# Altium PCB 20K Control Board V1.1.PcbDoc (part 14 of 24)
Units mm, origin at the board's own origin, x right, y up, seen from the top; angles counter-clockwise.
Board outline 132 x 260 mm, 4 copper layers (Top Layer, GND, VCC, Bottom Layer); 1384 components, 779 nets, 4515 pads, 1774 vias.
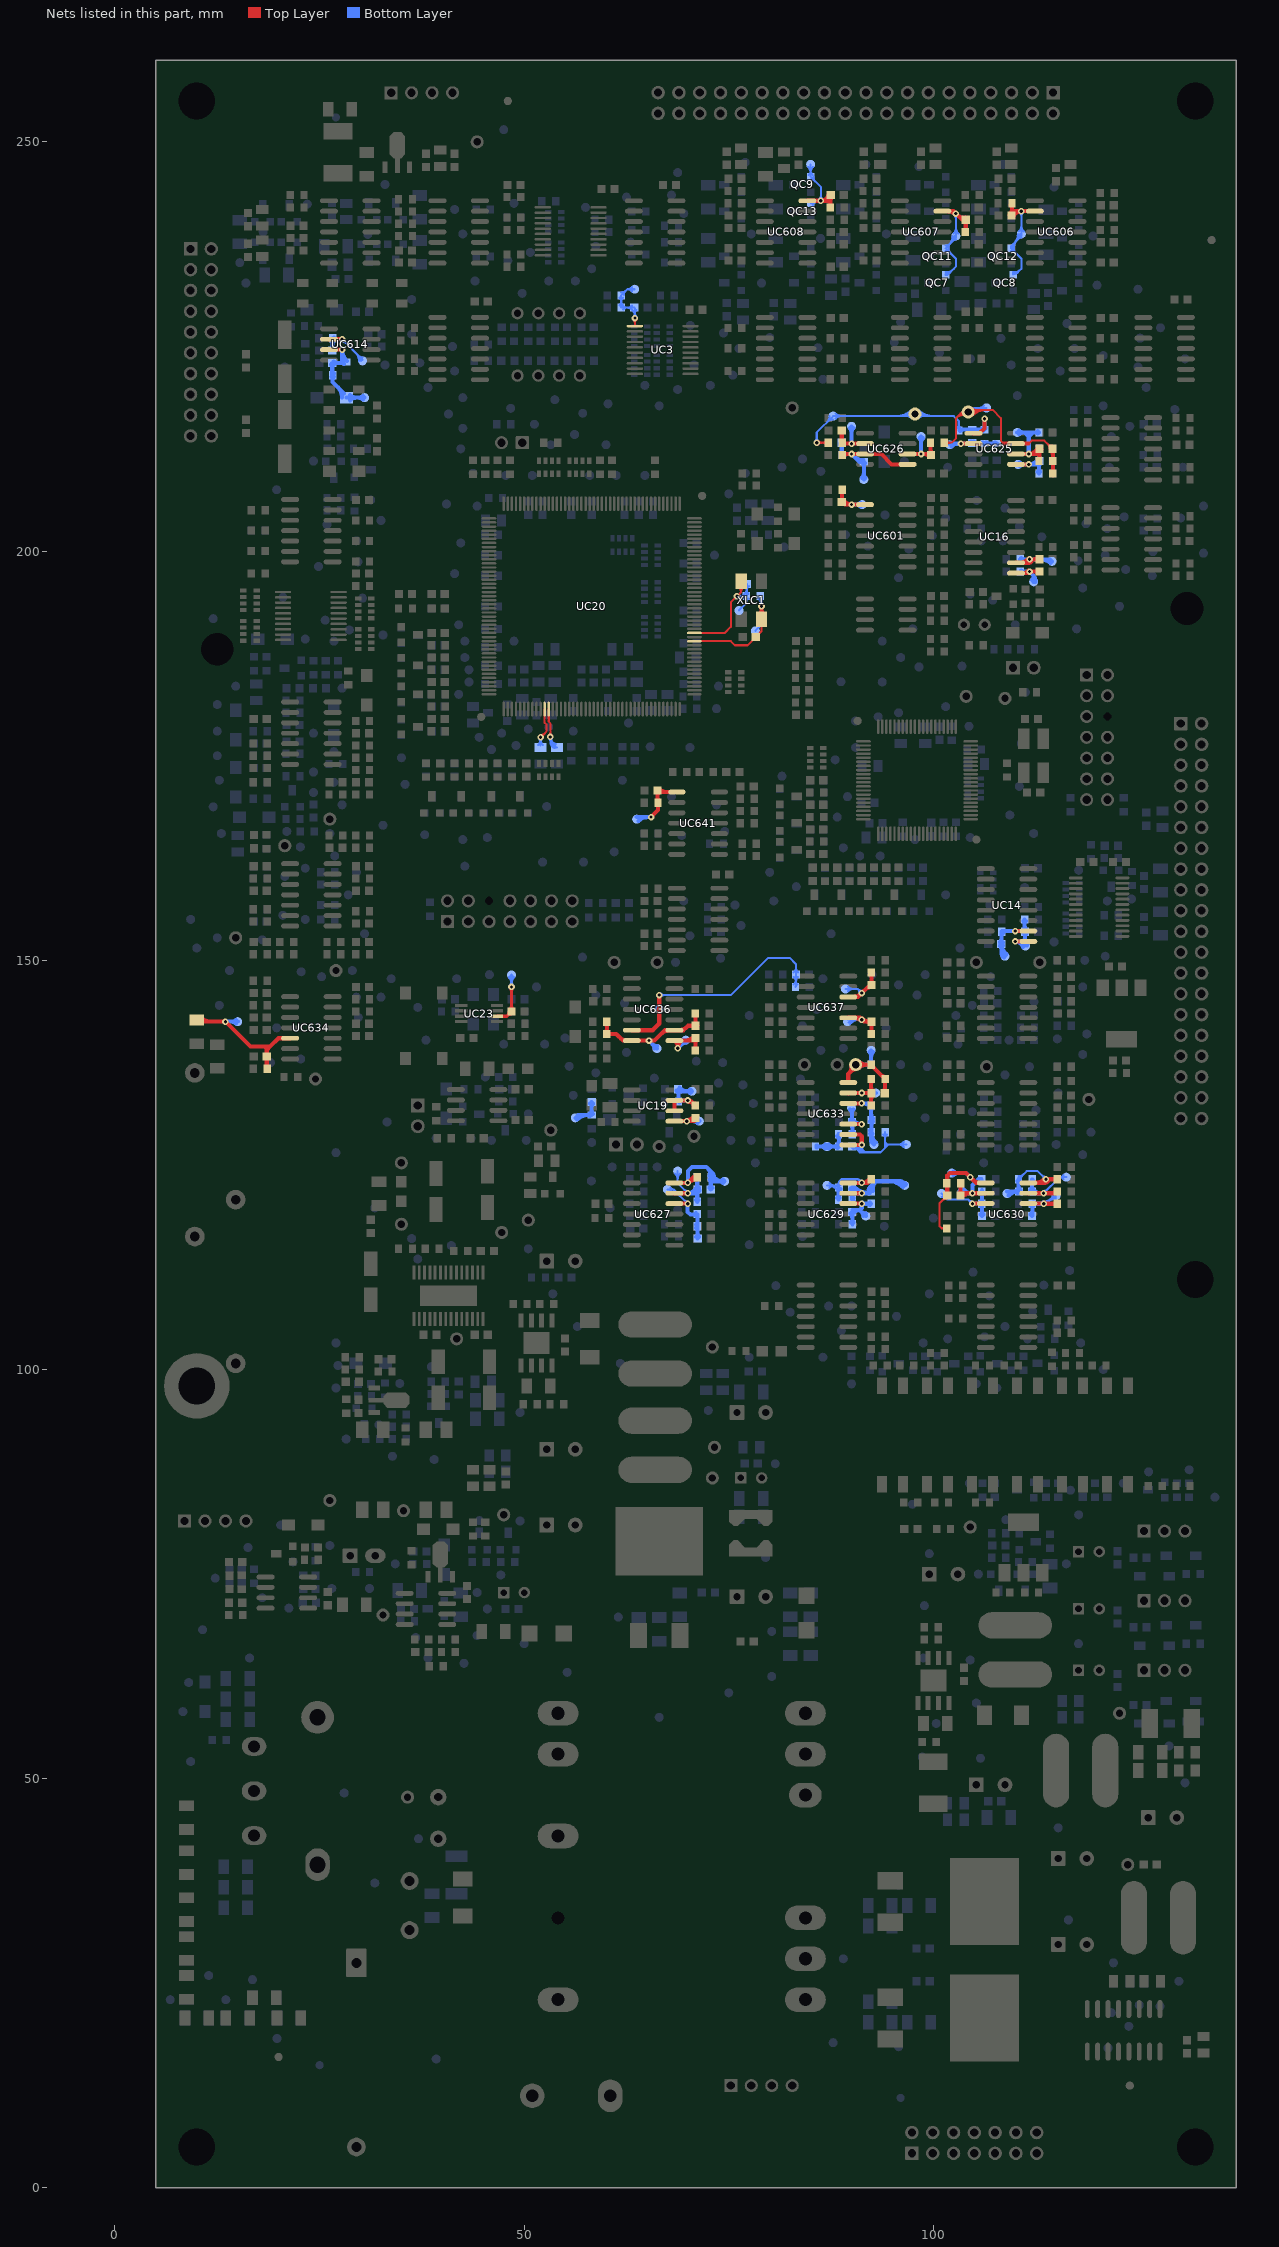
[diagram p16: the nets of this part, all layers, seen from the top]

## Via types
v1: diameter 0.8, hole 0.4, Top Layer to Bottom Layer, tented both sides, 1354 vias
v2: diameter 1.2, hole 0.7, Top Layer to Bottom Layer, 261 vias
v3: diameter 0.8, hole 0.4, Top Layer to Bottom Layer, 58 vias
v4: diameter 1.2, hole 0.7, Top Layer to Bottom Layer, tented top, 58 vias
v5: diameter 0.8, hole 0.4, Top Layer to Bottom Layer, tented top, 22 vias
v6: diameter 1.2, hole 0.7, Top Layer to Bottom Layer, tented both sides, 13 vias
v7: diameter 1.2, hole 0.7, Top Layer to Bottom Layer, tented bottom, 8 vias

## Nets (pads, with @x,y where several pads share a name; then routed paths per layer and width w, separated by ;. In a path a pad name is that pad's centre, name@x,y a point inside that pad or via, vN(x,y) a via of type N, cw(c..) or ccw(c..) an arc to the next point about the centre after c; other vN are vias at no path point) (continued)
NetCC56_1: CC56.1 pad.ICT@92.4,139 RC112.2 RC127.2 RC137.2 TP19.1 UC633.14 | length 23.9
  Top Layer w0.5: UC633.14@89.6,135.06 89.6,136.1 90.5,137 90.75,137.25 RC137.2@92.4,137.25 92.4,137.2 RC112.2@94.1,135.5 94.1,133.8 CC56.1@94.05,133.75 ; 89.725,136.225 ccw(c89.069,136.881) TP19.1@89.967,137.113 ; 89.988,136.488 cw(c90.5,135.976) TP19.1@90.5,136.7 ; TP19.1@90.889,136.861 cw(c91.828,135.922) 91.828,137.25 cw(c91.828,138.578) TP19.1@90.889,137.639 ; RC137.2@92.259,137.109 ccw(c91.917,136.767) 91.917,137.25 ccw(c91.917,137.733) RC137.2@92.259,137.391 ; RC137.2@92.4,137 cw(c92.4,136.517) 92.741,136.859 cw(c93.083,137.2) RC137.2@92.6,137.2 ; RC112.2@93.673,135.927 ccw(c94.1,136.354) RC112.2@94.1,135.75 ; CC56.1@93.873,133.927 ccw(c93.326,134.474) 94.1,134.474 ; RC112.2@93.959,135.309 cw(c93.617,134.967) 94.1,134.967 cw(c94.583,134.967) RC112.2@94.241,135.309
  Bottom Layer w0.5: TP19.1@90.5,137.25 RC127.2@92.4,137.25 pad.ICT@92.4,139 ; TP19.1@90.889,136.861 cw(c91.828,135.922) 91.828,137.25 cw(c91.828,138.578) TP19.1@90.889,137.639 ; pad.ICT@92.188,138.788 cw(c91.676,138.276) 92.4,138.276 cw(c93.124,138.276) pad.ICT@92.612,138.788 ; RC127.2@92.259,137.109 ccw(c91.917,136.767) 91.917,137.25 ccw(c91.917,137.733) RC127.2@92.259,137.391 ; RC127.2@92.259,137.441 ccw(c91.917,137.783) 92.4,137.783 ccw(c92.883,137.783) RC127.2@92.541,137.441
NetCC56_2: CC56.2 pad.ICT@92.96,133.79 RC108.2 RC112.1 UC633.13 | length 12.6
  Top Layer w0.5: UC633.13@89.64,133.75 UC633.13@89.6,133.79 CC56.2@92.41,133.79 ; 91.75,133.79 cw(c91.75,133.05) CC56.2@92.273,133.573 ; 91.943,133.79 ccw(c91.943,134.257) CC56.2@92.273,133.927 ; RC108.2@92.259,132.441 ccw(c91.917,132.783) 92.4,132.783 ccw(c92.883,132.783) RC108.2@92.541,132.441 ; RC112.1@92.259,135.309 cw(c91.917,134.967) 92.4,134.967 cw(c92.883,134.967) RC112.1@92.541,135.309 ; RC108.2@92.4,132.25 RC112.1@92.4,135.5 ; 92.4,133.026 cw(c93.174,133.026) CC56.2@92.627,133.573 ; 92.4,134.474 ccw(c93.174,134.474) CC56.2@92.627,133.927
  Bottom Layer w0.5: v1(91.25,133.79) pad.ICT@92.96,133.79 ; pad.ICT@92.748,133.578 ccw(c92.236,133.066) 92.236,133.79 ccw(c92.236,134.514) pad.ICT@92.748,134.002
NetCC57_2: CC57.2 pad.ICT@66.5,144 RC119.2 UC636.6 | length 38.4
  Top Layer w0.5: UC636.6@63.15,141.46 65.71,141.46 66.5,142.25 v1(66.5,145.75)
  Bottom Layer w0.25: pad.ICT@66.199,144.301 ccw(c65.474,145.026) 66.5,145.026 ccw(c67.526,145.026) pad.ICT@66.801,144.301 ; v1@66.306,145.556 cw(c65.836,145.086) 66.5,145.086 cw(c67.164,145.086) 66.694,145.556 cw(c67.164,145.086) 67.164,145.75 cw(c67.164,146.414) v1@66.694,145.944 ; pad.ICT@66.5,144 v1(66.5,145.75) 75.25,145.75 79.8,150.3 82.45,150.3 83.2,149.55 83.2,148.5 83.2,146.8 RC119.2@83.15,146.75 ; RC119.2@82.92,147.03 ccw(c82.245,147.705) 83.2,147.705 ; CC57.2@82.935,147.985 cw(c82.295,147.345) 83.2,147.345 cw(c84.105,147.345) CC57.2@83.465,147.985 ; CC57.2@82.935,148.515 ccw(c82.295,149.155) 83.2,149.155 ccw(c84.105,149.155) CC57.2@83.465,148.515 ; 83.2,147.464 ccw(c83.814,147.464) RC119.2@83.38,147.03
NetCC58_2: CC58.2 pad.ICT@90,215.25 RC109.1 UC626.2 | length 9.9
  Top Layer w0.25: RC109.1@88.8,213.3 RC109.1@88.965,213.135
  Top Layer w0.5: CC58.2@88.623,214.573 cw(c88.196,214.146) 88.8,214.146 cw(c89.404,214.146) CC58.2@88.977,214.573 ; 88.8,213.904 ccw(c89.454,213.904) RC109.1@88.991,213.441 ; CC58.2@88.8,214.75 88.8,213.3 88.965,213.135 UC626.2@91.65,213.135 ; RC109.1@88.991,213.341 ccw(c89.49,213.84) 89.49,213.135
  Bottom Layer w0.5: pad.ICT@89.788,215.038 cw(c89.276,214.526) 90,214.526 cw(c90.724,214.526) pad.ICT@90.212,215.038 ; v1(90,213.135) pad.ICT@90,215.25
NetCC59_2: CC59.2 pad.ICT@101,121.5 RC113.1 RC116.1 UC630.3 | length 15.8
  Top Layer w0.5: v1(104.77,120.27) UC630.3@106.4,120.27
  Bottom Layer w0.25: pad.ICT@101,121.075 cw(c101,120.049) 101.726,120.774 cw(c102.451,121.5) pad.ICT@101.425,121.5 ; pad.ICT@101,121.5 101.75,120.75 104.29,120.75 v1(104.77,120.27) ; v1@104.495,120.27 ccw(c103.831,120.27) 104.301,120.739 ccw(c104.77,121.209) v1@104.77,120.545
  Bottom Layer w0.5: v1(104.77,120.27) RC113.1@105.93,120.27 ; 105.369,120.27 cw(c105.369,119.719) RC113.1@105.759,120.109 ; RC113.1@105.759,120.059 cw(c105.296,119.596) 105.95,119.596 ; RC113.1@105.759,120.441 ccw(c105.296,120.904) 105.95,120.904 ; RC116.1@105.759,121.559 cw(c105.296,121.096) 105.95,121.096 ; CC59.2@105.773,118.927 ccw(c105.346,119.354) 105.95,119.354 ccw(c106.554,119.354) CC59.2@106.127,118.927 ; CC59.2@105.95,118.75 RC116.1@105.95,121.9
NetCC60_1: CC60.1 pad.ICT@102,213 RC118.2 RC126.2 UC625.2 | length 11.8
  Top Layer w0.5: v1(103.365,213.135) UC625.2@104.9,213.135
  Bottom Layer w0.5: pad.ICT@101.885,213.135 v1(103.365,213.135) CC60.1@104.785,213.135 ; pad.ICT@102.212,212.788 cw(c103.05,211.95) v1@103.05,213.135 ; 103.99,213.135 ccw(c103.99,213.96) CC60.1@104.573,213.377 ; CC60.1@104.8,213.15 RC126.2@106.25,213.15 RC118.2@107.75,213.15 ; CC60.1@104.927,213.377 ccw(c105.474,213.924) 105.474,213.15 ; RC126.2@106.059,213.009 ccw(c105.717,212.667) 105.717,213.15 ccw(c105.717,213.633) RC126.2@106.059,213.291 ; RC126.2@106.441,213.009 cw(c106.783,212.667) 106.783,213.15 cw(c106.783,213.633) RC126.2@106.441,213.291 ; RC118.2@107.559,213.009 ccw(c107.217,212.667) 107.217,213.15 ccw(c107.217,213.633) RC118.2@107.559,213.291
NetCC60_2: CC60.2 pad.ICT@87.75,216.5 RC105.2 RC109.2 RC126.1 TP14.1 UC625.1 | length 50.6
  Top Layer w0.25: v1(85.75,213.25) RC109.2@87.15,213.25 ; v1@85.944,213.056 cw(c86.414,212.586) 86.414,213.25 cw(c86.414,213.914) v1@85.944,213.444 ; RC109.2@86.92,213.02 ccw(c86.365,212.465) 86.365,213.25 ccw(c86.365,214.035) RC109.2@86.92,213.48
  Top Layer w0.5: UC625.1@104.9,214.405 105.655,214.405 106.25,215 v1(106.25,216.178)
  Bottom Layer w0.25: v1@85.556,213.444 ccw(c85.086,213.914) 85.75,213.914 ccw(c86.414,213.914) v1@85.944,213.444 ; v1(85.75,213.25) 85.75,214.5 pad.ICT@87.75,216.5 102.5,216.5 103.1,215.9 RC105.2@103.1,214.75 RC105.2@103.2,214.85 ; pad.ICT@87.325,216.5 cw(c86.299,216.5) 87.024,215.774 cw(c87.75,215.049) pad.ICT@87.75,216.075 ; pad.ICT@88.051,216.199 cw(c88.776,215.474) 88.776,216.5 cw(c88.776,217.526) pad.ICT@88.051,216.801 ; 95.517,216.5 ccw(c95.517,218.983) TP14.1@97.273,217.227 ; 96.12,216.5 ccw(c96.12,218.38) TP14.1@97.449,217.051 ; TP14.1@97.273,216.273 ccw(c96.724,215.724) 96.724,216.5 ccw(c96.724,217.776) TP14.1@97.626,216.874 ; TP14.1@97.874,216.874 ccw(c98.776,217.776) 98.776,216.5 ccw(c98.776,215.724) TP14.1@98.227,216.273 ; TP14.1@98.051,217.051 ccw(c99.38,218.38) 99.38,216.5 ; TP14.1@98.227,217.227 ccw(c99.983,218.983) 99.983,216.5 ; RC105.2@102.87,215.03 ccw(c102.315,215.585) 103.1,215.585 ccw(c103.885,215.585) RC105.2@103.33,215.03
  Bottom Layer w0.5: RC105.2@103.2,214.85 RC126.1@106.25,214.85 v1(106.25,216.178) ; RC105.2@103.241,214.659 cw(c103.704,214.196) 103.704,214.85 ; 104.026,214.85 cw(c104.026,214.076) CC60.2@104.573,214.623 ; CC60.2@104.927,214.623 cw(c105.474,214.076) 105.474,214.85 ; RC126.1@106.059,214.709 ccw(c105.717,214.367) 105.717,214.85 ccw(c105.717,215.333) RC126.1@106.059,214.991 ; RC126.1@106.109,214.991 ccw(c105.767,215.333) 106.25,215.333 ccw(c106.733,215.333) RC126.1@106.391,214.991
NetCC61_1: CC61.1 pad.ICT@102.25,124 RC122.2 RC136.2 UC630.1 | length 21.7
  Top Layer w0.25: CC61.1@101.325,121.25 cw(c100.42,121.25) 101.06,120.61 cw(c101.7,119.97) CC61.1@101.7,120.875 ; RC122.2@101.39,117.055 ccw(c101,116.763) 101,117.25 ; RC122.2@101.39,117.445 cw(c101,117.737) 101,117.25 ; RC122.2@101.65,117.25 101,117.25 ; CC61.1@101.7,121.25 100.75,120.3 100.75,117.5 101,117.25
  Top Layer w0.5: RC136.2@101.509,122.559 cw(c101.046,122.096) 101.7,122.096 ; RC136.2@101.509,122.941 ccw(c101.046,123.404) 101.7,123.404 ; CC61.1@101.523,121.427 ccw(c101.096,121.854) 101.7,121.854 ccw(c102.304,121.854) CC61.1@101.877,121.427 ; CC61.1@101.7,121.25 101.7,123.7 102,124 104,124 105.19,122.81 UC630.1@106.4,122.81 ; 104.815,123.185 ccw(c105.6,123.971) UC630.1@105.6,122.86
  Bottom Layer w0.5: pad.ICT@102.25,124 104,124 v1(104.5,123.5) ; pad.ICT@102.462,123.788 cw(c102.974,123.276) 102.974,124 cw(c102.974,124.724) pad.ICT@102.462,124.212
NetCC61_2: CC61.2 pad.ICT@103.5,121.75 RC132.2 RC136.1 UC630.2 | length 13.1
  Top Layer w0.5: CC61.2@103.123,121.427 ccw(c102.696,121.854) 103.3,121.854 ccw(c103.904,121.854) CC61.2@103.477,121.427 ; CC61.2@103.3,121.25 RC136.1@103.3,122.7 ; 103.3,122.096 cw(c103.954,122.096) RC136.1@103.491,122.559 ; CC61.2@103.477,121.073 cw(c104.604,119.946) v1@104.604,121.54 ; CC61.2@103.59,121.54 v1(104.77,121.54) UC630.2@106.4,121.54
  Bottom Layer w0.5: pad.ICT@103.5,121.75 103.71,121.54 v1(104.77,121.54) 104.77,122.52 105.5,123.25 RC132.2@105.9,123.25 ; pad.ICT@103.712,121.962 ccw(c104.731,122.981) v1@104.731,121.54 ; 104.79,122.54 cw(c105.9,121.431) RC132.2@105.9,123
NetCC65_2: CC65.2 pad.ICT@91.5,208.75 RC115.1 RC124.1 RC125.2 UC626.3 UC626.5 | length 21
  Top Layer w0.25: RC115.1@88.85,211.75 RC115.1@88.965,211.865
  Top Layer w0.5: RC115.1@88.965,211.865 v1(90,211.865) UC626.3@91.65,211.865 93.635,211.865 94.905,210.595 UC626.5@96.85,210.595 ; RC115.1@88.991,211.659 cw(c89.49,211.16) 89.49,211.865
  Bottom Layer w0.5: CC65.2@88.623,213.073 cw(c88.196,212.646) 88.8,212.646 cw(c89.404,212.646) CC65.2@88.977,213.073 ; RC124.1@88.8,211.8 CC65.2@88.8,213.25 ; 88.8,212.404 ccw(c89.454,212.404) RC124.1@88.991,211.941 ; RC124.1@88.865,211.865 v1(90,211.865) 90.965,210.9 RC125.2@91.5,210.9 pad.ICT@91.5,208.75 ; RC124.1@88.991,211.659 cw(c89.49,211.16) 89.49,211.865 ; v1@90.281,211.584 ccw(c91.45,212.754) RC125.2@91.45,211.1 ; pad.ICT@91.288,208.962 ccw(c90.776,209.474) 91.5,209.474 ccw(c92.224,209.474) pad.ICT@91.712,208.962 ; RC125.2@91.359,210.759 cw(c91.017,210.417) 91.5,210.417 cw(c91.983,210.417) RC125.2@91.641,210.759
NetCC66_1: CC66.1 pad.ICT@96.7,127.5 RC131.1 UC633.8 UC633.9 | length 30.6
  Top Layer w0.5: UC633.8@89.6,127.44 v1(91.25,127.44) 91.25,128.5 91.04,128.71 UC633.9@89.6,128.71
  Bottom Layer w0.25: CC66.1@90.047,127.375 cw(c90.069,126.516) 90.676,127.124 ; CC66.1@90.053,127.125 cw(c90.089,125.713) 91.088,126.712 ; CC66.1@90.3,127.25 91,126.55 93.55,126.55 94.1,127.1 ; CC66.1@90.55,127.25 91.25,126.55 ; 90.75,127.25 91.25,126.75 ; 90.75,127.44 91.25,126.94 ; v1(91.25,127.44) 91.25,126.55 ; 91.64,126.55 91.25,126.94 ; RC131.1@93.87,128.72 cw(c93.315,128.165) 94.1,128.165 cw(c94.885,128.165) RC131.1@94.33,128.72 ; 94.1,127.75 94.35,127.5 94.5,127.5 ; RC131.1@94.1,129 94.1,127.5 ; pad.ICT@96.399,127.199 ccw(c95.674,126.474) 95.674,127.5 ccw(c95.674,128.526) pad.ICT@96.399,127.8 ; pad.ICT@96.7,127.5 94.5,127.5 ; v1@91.056,127.246 cw(c90.586,126.776) 91.25,126.776 ; v1@91.056,127.246 cw(c90.586,126.776) 91.25,126.776 ; v1@91.056,127.246 cw(c90.586,126.776) 91.25,126.776 ; v1@91.103,127.208 cw(c90.933,126.94) 91.25,126.94 ; v1@91.103,127.208 cw(c90.933,126.94) 91.25,126.94 ; v1@91.103,127.208 cw(c90.933,126.94) 91.25,126.94 ; 91.25,126.55 91.25,126.75 ; 91.25,126.75 91.25,126.94 ; 91.25,126.776 cw(c91.914,126.776) v1@91.444,127.246 ; 91.25,126.776 cw(c91.914,126.776) v1@91.444,127.246 ; 91.25,126.776 cw(c91.914,126.776) v1@91.444,127.246 ; 91.25,126.94 cw(c91.567,126.94) v1@91.397,127.208 ; 91.25,126.94 cw(c91.567,126.94) v1@91.397,127.208 ; 91.25,126.94 cw(c91.567,126.94) v1@91.397,127.208 ; 94.1,127.1 94.1,127.5 ; 94.1,127.1 94.5,127.5 ; 94.1,127.5 94.25,127.5 94.5,127.5
  Bottom Layer w0.5: CC66.1@90.05,127.25 90.24,127.44 v1(91.25,127.44) ; CC66.1@90.227,127.073 cw(c91.112,126.188) v1@91.112,127.44
NetCC66_2: CC66.2 pad.ICT@87,127.25 RC138.1 RC139.2 | length 9.6
  Bottom Layer w0.5: RC138.1@85.741,127.109 cw(c86.083,126.767) 86.083,127.25 cw(c86.083,127.733) RC138.1@85.741,127.391 ; RC138.1@85.85,127.25 CC66.2@88.45,127.25 88.45,128.7 RC139.2@88.4,128.75 ; pad.ICT@86.788,127.038 ccw(c86.276,126.526) 86.276,127.25 ccw(c86.276,127.974) pad.ICT@86.788,127.462 ; pad.ICT@87.212,127.038 cw(c87.724,126.526) 87.724,127.25 cw(c87.724,127.974) pad.ICT@87.212,127.462 ; RC139.2@88.259,128.559 cw(c87.796,128.096) 88.45,128.096 ; CC66.2@88.273,127.073 ccw(c87.846,126.646) 87.846,127.25 ccw(c87.846,127.854) 88.273,127.427 ccw(c87.846,127.854) 88.45,127.854 ccw(c89.054,127.854) CC66.2@88.627,127.427
NetCC67_2: CC67.2 pad.ICT@110.345,210.595 RC142.1 RC145.2 UC625.5 | length 12.7
  Top Layer w0.5: UC625.5@110.1,210.595 v1(111.655,210.595)
  Bottom Layer w0.5: pad.ICT@110.345,210.595 v1(111.655,210.595) ; pad.ICT@110.557,210.383 cw(c111.069,209.871) 111.069,210.595 cw(c111.069,211.319) pad.ICT@110.557,210.807 ; CC67.2@112.644,210.595 ccw(c112.644,211.225) CC67.2@113.151,210.852 ; CC67.2@112.749,211.148 cw(c111.655,211.953) v1(111.655,210.595) ; RC142.1@112.759,209.691 ccw(c112.417,210.033) 112.9,210.033 ccw(c113.383,210.033) RC142.1@113.041,209.691 ; RC145.2@112.759,212.309 cw(c112.417,211.967) 112.9,211.967 cw(c113.383,211.967) RC145.2@113.041,212.309 ; CC67.2@112.805,210.595 v1(111.655,210.595) ; RC142.1@112.9,209.5 RC145.2@112.9,212.5 ; 112.9,210.276 cw(c113.674,210.276) CC67.2@113.127,210.823 ; 112.9,211.724 ccw(c113.674,211.724) CC67.2@113.127,211.177
NetCC68_1: CC68.1 pad.ICT@90,132 RC139.1 UC633.10 | length 10
  Top Layer w0.5: UC633.10@89.6,129.98 v1(91.23,129.98)
  Bottom Layer w0.5: pad.ICT@89.788,131.788 cw(c89.155,131.155) 90.05,131.155 ; CC68.1@89.873,130.073 cw(c89.326,129.526) 90.1,129.526 ; CC68.1@89.873,130.427 ccw(c89.446,130.854) 90.05,130.854 ccw(c90.654,130.854) CC68.1@90.227,130.427 ; RC139.1@89.959,128.941 ccw(c89.617,129.283) 90.1,129.283 ccw(c90.583,129.283) RC139.1@90.241,128.941 ; CC68.1@90.05,130.25 pad.ICT@90.05,131.7 ; 90.05,131.396 cw(c90.604,131.396) pad.ICT@90.212,131.788 ; RC139.1@90.1,128.75 CC68.1@90.1,130.2 ; CC68.1@90.235,130.419 ccw(c91.23,131.329) v1(91.23,129.98) CC68.1@90.32,129.98
NetCC69_1: CC69.1 pad.ICT@92.75,127.5 RC131.2 RC140.2 UC633.12 | length 14
  Top Layer w0.5: UC633.12@89.6,132.52 v1(91.23,132.52)
  Bottom Layer w0.5: v1(91.23,132.52) 92.13,132.52 RC140.2@92.4,132.25 ; v1@91.386,132.52 cw(c91.386,131.286) RC140.2@92.259,132.159 ; RC131.2@92.259,128.809 cw(c91.917,128.467) 92.4,128.467 cw(c92.883,128.467) RC131.2@92.541,128.809 ; RC131.2@92.259,129.191 ccw(c91.796,129.654) 92.45,129.654 ; RC140.2@92.259,132.059 cw(c91.917,131.717) 92.4,131.717 cw(c92.883,131.717) RC140.2@92.541,132.059 ; CC69.1@92.273,130.323 cw(c91.846,129.896) 92.45,129.896 cw(c93.054,129.896) CC69.1@92.627,130.323 ; CC69.1@92.4,130.55 RC140.2@92.4,132.25 ; 92.4,131.224 ccw(c93.174,131.224) CC69.1@92.627,130.677 ; RC131.2@92.45,129.05 CC69.1@92.45,130.5 CC69.1@92.45,130.3 ; RC140.2@92.45,132.15 92.45,132.2 RC140.2@92.4,132.25 ; pad.ICT@92.75,127.5 92.4,127.85 RC131.2@92.4,129 ccw(c94.156,129) pad.ICT@92.955,127.719
NetCC70_1: CC70.1 pad.ICT@98.5,214 RC135.1 UC626.6 | length 9.6
  Top Layer w0.5: UC626.6@96.85,211.865 v1(98.5,211.865) 99.585,211.865 99.65,211.93 RC135.1@99.65,213.25 ; v1@98.819,211.865 cw(c98.819,210.869) CC70.1@99.523,211.573 ; RC135.1@99.509,213.059 cw(c99.167,212.717) 99.65,212.717 cw(c100.133,212.717) RC135.1@99.791,213.059 ; 99.65,212.474 ccw(c100.424,212.474) CC70.1@99.877,211.927
  Bottom Layer w0.5: pad.ICT@98.288,213.788 cw(c97.776,213.276) 98.5,213.276 cw(c99.224,213.276) pad.ICT@98.712,213.788 ; v1(98.5,211.865) pad.ICT@98.5,214
NetCC73_2: CC73.2 pad.ICT@69.75,140.25 RC149.2 UC636.8 | length 12.5
  Top Layer w0.5: v1@68.75,139.168 cw(c70.084,139.168) UC636.8@69.184,140.153 ; v1(68.75,139.25) 68.75,139.79 UC636.8@68.35,140.19 CC73.2@70.95,140.19 ; v1@68.75,139.624 cw(c69.281,139.624) UC636.8@69.161,140.141 ; 69.598,140.19 ccw(c69.598,141.852) CC73.2@70.773,140.677 ; RC149.2@70.759,139.191 ccw(c70.296,139.654) 70.95,139.654 ; CC73.2@70.773,140.323 cw(c70.346,139.896) 70.95,139.896 cw(c71.554,139.896) CC73.2@71.127,140.323 ; CC73.2@70.81,140.19 CC73.2@70.95,140.05 ; RC149.2@70.95,139.05 CC73.2@70.95,140.5
  Bottom Layer w0.5: v1(68.75,139.25) pad.ICT@69.75,140.25 ; pad.ICT@69.45,140.25 cw(c68.726,140.25) 69.238,139.738 cw(c69.75,139.226) pad.ICT@69.75,139.95
NetCC75_1: CC75.1 pad.ICT@110.25,214.5 RC151.2 RC152.2 UC625.6 | length 16.6
  Top Layer w0.5: UC625.6@110.1,211.865 v1(111.655,211.865) ; 112.387,211.865 ccw(c112.387,212.72) CC75.1@113.183,212.409 ; CC75.1@112.717,212.591 cw(c111.655,213.005) v1(111.655,211.865) ; RC152.2@112.759,211.191 ccw(c112.296,211.654) 112.95,211.654 ; CC75.1@112.773,212.323 cw(c112.346,211.896) 112.95,211.896 cw(c113.554,211.896) CC75.1@113.127,212.323 ; 112.835,211.865 v1(111.655,211.865) ; RC152.2@112.95,211.05 CC75.1@112.95,212.5
  Bottom Layer w0.5: pad.ICT@110.25,214.5 111.655,214.5 ; pad.ICT@110.462,214.288 cw(c110.974,213.776) 110.974,214.5 cw(c110.974,215.224) pad.ICT@110.462,214.712 ; 111.155,214.5 111.655,214 ; v1(111.655,211.865) 111.655,214 ; 112.155,214.5 111.655,214 ; RC151.2@112.759,214.359 ccw(c112.417,214.017) 112.417,214.5 ccw(c112.417,214.983) RC151.2@112.759,214.641 ; RC151.2@112.9,214.5 111.655,214.5 ; 111.655,214 111.655,214.5
NetCC75_2: CC75.2 pad.ICT@106.5,217.5 RC135.2 RC146.2 RC152.1 TP17.1 UC625.7 | length 48
  Top Layer w0.25: RC135.2@101.25,213.25 RC135.2@101.3,213.3 ; RC135.2@101.35,213.25 102.25,213.25 102.75,213.75 102.75,216.25 103.75,217.25 107.25,217.25 108.25,216.25 108.25,213.5 108.615,213.135 ; RC135.2@101.58,213.02 cw(c102.135,212.465) 102.135,213.25 cw(c102.135,214.035) RC135.2@101.58,213.48 ; 102.686,216.186 cw(c103.77,215.103) TP17.1@104.146,216.588 ; 102.997,216.497 cw(c103.895,215.599) TP17.1@104.207,216.83 ; 103.308,216.808 cw(c104.021,216.096) TP17.1@104.268,217.073 ; TP17.1@104.374,216.876 cw(c105.276,215.974) 105.276,217.25 cw(c105.276,218.026) TP17.1@104.727,217.477 ; TP17.1@104.551,216.699 cw(c105.88,215.37) 105.88,217.25 ; TP17.1@104.727,216.523 cw(c106.483,214.767) 106.483,217.25 ; 111.635,213.135 112,213.5 113.55,213.5 CC75.2@114.55,212.5 ; CC75.2@114.175,212.5 ccw(c113.27,212.5) 113.91,213.14 ccw(c114.55,213.78) CC75.2@114.55,212.875
  Top Layer w0.5: 108.615,213.135 UC625.7@110.1,213.135 111.635,213.135 ; CC75.2@114.373,212.323 cw(c113.826,211.776) 114.6,211.776 ; RC146.2@114.459,209.691 ccw(c114.117,210.033) 114.6,210.033 ccw(c115.083,210.033) RC146.2@114.741,209.691 ; RC152.1@114.459,210.809 cw(c114.117,210.467) 114.6,210.467 cw(c115.083,210.467) RC152.1@114.741,210.809 ; RC152.1@114.459,211.191 ccw(c114.117,211.533) 114.6,211.533 ccw(c115.083,211.533) RC152.1@114.741,211.191 ; CC75.2@114.55,212.5 CC75.2@114.55,212.7 ; RC146.2@114.6,209.25 CC75.2@114.6,212.2
  Bottom Layer w0.25: TP17.1@104.188,217.043 cw(c105.064,216.433) 105.064,217.5 ; TP17.1@104.25,217 104.75,217.5 pad.ICT@106.5,217.5 ccw(c106.5,215.433) TP17.1@104.804,216.614 ; TP17.1@104.394,216.9 cw(c105.543,216.1) 105.543,217.5 ; TP17.1@104.599,216.757 cw(c106.021,215.767) pad.ICT@106.021,217.5 ; pad.ICT@106.199,217.199 ccw(c105.474,216.474) 105.474,217.5 ccw(c105.474,218.526) pad.ICT@106.199,217.801
NetCC80_1: CC80.1 pad.ICT@66.22,139.22 RC130.1 RC134.1 RC157.1 UC636.7 UC636.9 | length 24.9
  Top Layer w0.5: RC130.1@59.959,141.191 ccw(c59.617,141.533) 60.1,141.533 ccw(c60.583,141.533) RC130.1@60.241,141.191 ; RC134.1@59.959,142.309 cw(c59.617,141.967) 60.1,141.967 cw(c60.583,141.967) RC134.1@60.241,142.309 ; RC134.1@60.1,142.5 RC130.1@60.1,141 61.25,141 62.06,140.19 UC636.7@63.15,140.19 65.94,140.19 67.21,141.46 UC636.9@68.35,141.46 69.46,141.46 70,142 CC80.1@71.2,142 ; RC130.1@60.241,140.859 cw(c60.583,140.517) 60.583,141 cw(c60.583,141.483) RC130.1@60.241,141.141 ; 61.77,140.48 ccw(c62.35,141.061) UC636.7@62.35,140.24 ; 66.884,141.134 cw(c67.55,140.468) UC636.9@67.55,141.41 ; 67.04,141.29 cw(c67.389,140.941) UC636.9@67.535,141.412 ; UC636.9@69.15,141.51 ccw(c69.15,142.379) 69.765,141.765 ; RC157.1@70.759,143.309 cw(c70.296,142.846) 70.95,142.846 ; CC80.1@70.773,141.823 ccw(c70.346,141.396) 70.346,142 ccw(c70.346,142.604) 70.773,142.177 ccw(c70.346,142.604) 70.95,142.604 ccw(c71.554,142.604) CC80.1@71.127,142.177 ; CC80.1@70.95,142 RC157.1@70.95,143.45
  Bottom Layer w0.5: v1(65.25,140.19) pad.ICT@66.22,139.22 ; pad.ICT@65.92,139.22 ccw(c65.196,139.22) 65.708,139.732 ccw(c66.22,140.244) pad.ICT@66.22,139.52
NetCC85_2: CC85.2 pad.ICT@67.5,122 RC165.2 RC167.2 UC627.12 | length 15.3
  Top Layer w0.5: UC627.12@68.35,120.27 v1(69.98,120.27)
  Bottom Layer w0.25: pad.ICT@67.5,122 68.25,122 ; pad.ICT@67.865,121.782 cw(c68.25,121.551) 68.25,122 ; pad.ICT@67.865,122.218 ccw(c68.25,122.449) 68.25,122 ; v1@69.705,120.27 ccw(c69.041,120.27) 69.511,120.739 ccw(c69.98,121.209) v1@69.98,120.545 ; v1(69.98,120.27) 68.25,122
  Bottom Layer w0.5: v1(69.98,120.27) 69.98,119.27 70.3,118.95 71.2,118.95 CC85.2@71.2,116 ; RC165.2@71.009,117.309 cw(c70.546,116.846) 71.2,116.846 ; RC165.2@71.009,117.691 ccw(c70.546,118.154) 71.2,118.154 ; RC167.2@71.009,119.091 cw(c70.667,119.433) 70.667,118.95 cw(c70.667,118.467) 71.009,118.809 cw(c70.546,118.346) 71.2,118.346 ; CC85.2@71.023,116.177 ccw(c70.596,116.604) 71.2,116.604 ccw(c71.804,116.604) CC85.2@71.377,116.177
NetCC86_2: CC86.2 pad.ICT@89.5,142.5 RC163.2 UC637.10 | length 14.1
  Top Layer w0.5: UC637.10@89.6,142.98 91.02,142.98 91.5,142.5 92.4,142.5 92.45,142.45 RC163.2@92.45,141 ; UC637.10@90.333,142.98 cw(c90.333,141.833) v1@91.144,142.644 ; v1@91.356,142.856 ccw(c92.216,143.716) CC86.2@92.216,142.5 ; RC163.2@92.259,141.191 ccw(c91.796,141.654) 92.45,141.654 ; CC86.2@92.273,142.677 cw(c91.846,143.104) 91.846,142.5 cw(c91.846,141.896) 92.273,142.323 cw(c91.846,141.896) 92.45,141.896 cw(c93.054,141.896) CC86.2@92.627,142.323
  Bottom Layer w0.25: pad.ICT@89.5,142.75 v1(91.25,142.75) ; pad.ICT@89.624,142.376 cw(c90.526,141.474) 90.526,142.75 ; pad.ICT@89.801,142.199 cw(c91.13,140.87) v1@91.13,142.75 ; v1@91.056,142.556 ccw(c90.586,142.086) 90.586,142.75 ccw(c90.586,143.414) v1@91.056,142.944
NetCC91_1: CC91.1 pad.ICT@68.75,124.25 RC177.2 RC178.2 UC627.13 | length 16.3
  Top Layer w0.5: UC627.13@68.35,121.54 v1(69.98,121.54)
  Bottom Layer w0.25: pad.ICT@68.449,123.949 cw(c67.724,123.224) 68.75,123.224 cw(c69.776,123.224) pad.ICT@69.051,123.949 ; pad.ICT@68.75,124.25 68.75,122.77 v1(69.98,121.54) ; v1@69.705,121.54 ccw(c69.041,121.54) 69.511,122.009 ccw(c69.98,122.479) v1@69.98,121.815
  Bottom Layer w0.5: CC91.1@70.839,121.54 ccw(c70.839,122.205) CC91.1@71.417,121.877 ; CC91.1@70.983,122.123 cw(c69.98,122.693) v1(69.98,121.54) CC91.1@71.15,121.54 ; RC177.2@71.009,120.691 ccw(c70.667,121.033) 71.15,121.033 ccw(c71.633,121.033) RC177.2@71.291,120.691 ; RC178.2@71.009,123.309 cw(c70.667,122.967) 71.15,122.967 cw(c71.633,122.967) RC178.2@71.291,123.309 ; RC177.2@71.15,120.5 RC178.2@71.15,123.5 ; 71.15,121.276 cw(c71.924,121.276) CC91.1@71.377,121.823 ; 71.15,122.724 ccw(c71.924,122.724) CC91.1@71.377,122.177
NetCC91_2: CC91.2 pad.ICT@74.5,123 RC169.2 RC178.1 UC627.14 | length 21.9
  Top Layer w0.5: UC627.14@68.35,122.81 v1(70,122.81) 70.69,123.5 ; v1@69.938,122.748 cw(c71.15,121.536) RC169.2@71.15,123.25 ; 70.46,123.27 cw(c70.789,122.941) RC169.2@71.042,123.332 ; RC169.2@71.004,123.364 ccw(c70.69,123.071) 70.69,123.5 ; RC169.2@71.004,123.636 cw(c70.69,123.929) 70.69,123.5 ; RC169.2@71.15,123.5 70.69,123.5
  Bottom Layer w0.5: v1(70,122.81) 70,124.25 70.5,124.75 72.25,124.75 72.8,124.2 CC91.2@72.8,122 ; 72.5,124.5 cw(c71.942,123.942) RC178.1@72.666,123.629 ; CC91.2@72.623,122.177 ccw(c72.196,122.604) 72.8,122.604 ccw(c73.404,122.604) CC91.2@72.977,122.177 ; RC178.1@72.638,123.238 ccw(c73.212,123.812) RC178.1@73.212,123 ; 72.8,122.846 cw(c73.454,122.846) RC178.1@72.991,123.309 ; RC178.1@72.8,123.25 73.05,123 pad.ICT@74.5,123 ; 72.8,124.154 ccw(c73.454,124.154) RC178.1@72.991,123.691 ; 72.938,124.062 cw(c72.426,123.55) RC178.1@73.15,123.55 ; RC178.1@72.991,123.591 ccw(c74.419,125.019) pad.ICT@74.419,123 ; RC178.1@73.021,123.979 cw(c72.669,123.628) RC178.1@73.125,123.431 ; pad.ICT@74.288,122.788 ccw(c73.776,122.276) 73.776,123 ccw(c73.776,123.724) pad.ICT@74.288,123.212
NetCC92_2: CC92.2 pad.ICT@89.25,146.5 RC174.2 UC637.12 | length 12.9
  Top Layer w0.5: UC637.12@89.6,145.52 90.77,145.52 v1(91.25,146) 92,146.75 CC92.2@92.45,146.75 ; UC637.12@90.4,145.57 ccw(c90.4,146.584) v1@91.117,145.867 ; 91.682,146.432 cw(c92.45,145.664) CC92.2@92.45,146.75 ; RC174.2@92.259,148.309 cw(c91.796,147.846) 92.45,147.846 ; CC92.2@92.273,147.177 ccw(c91.846,147.604) 92.45,147.604 ccw(c93.054,147.604) CC92.2@92.627,147.177 ; CC92.2@92.45,146.8 CC92.2@92.45,146.75 ; CC92.2@92.45,147 RC174.2@92.45,148.5
  Bottom Layer w0.25: pad.ICT@89.25,146.5 90.75,146.5 v1(91.25,146) ; pad.ICT@89.551,146.199 cw(c90.276,145.474) 90.276,146.5 cw(c90.276,147.526) pad.ICT@89.551,146.801 ; v1@90.975,146 ccw(c90.311,146) 90.781,146.469 ccw(c91.25,146.939) v1@91.25,146.275
NetCC93_2: CC93.2 pad.ICT@108.75,150.5 RC172.1 UC14.10 | length 11.6
  Top Layer w0.5: v1(110,153.575) UC14.10@111.6,153.575
  Bottom Layer w0.5: CC93.2@108.123,151.823 cw(c107.696,151.396) 108.3,151.396 cw(c108.904,151.396) CC93.2@108.477,151.823 ; CC93.2@108.123,152.177 ccw(c107.696,152.604) 108.3,152.604 ccw(c108.904,152.604) CC93.2@108.477,152.177 ; 108.3,151 ccw(c109.125,151) pad.ICT@108.63,150.34 ; 108.3,152.846 cw(c108.954,152.846) RC172.1@108.491,153.309 ; RC172.1@108.491,153.409 cw(c108.893,153.007) 108.893,153.575 ; pad.ICT@108.75,150.5 108.3,150.95 CC93.2@108.3,152 ; pad.ICT@108.93,150.74 cw(c109.875,152) CC93.2@108.3,152 ; v1(110,153.575) 108.375,153.575 108.3,153.5 CC93.2@108.3,152
NetCC94_2: CC94.2 pad.ICT@111.25,151.75 RC176.1 UC14.9 | length 12.2
  Top Layer w0.5: v1(110,152.305) UC14.9@111.6,152.305
  Bottom Layer w0.5: v1@110,152.373 v1(110,152.305) ; 110.731,152.305 cw(c110.731,151.548) pad.ICT@111.436,151.822 ; pad.ICT@110.97,151.641 ccw(c110,151.264) v1(110,152.305) ; RC176.1@111.009,154.809 cw(c110.667,154.467) 111.15,154.467 cw(c111.633,154.467) RC176.1@111.291,154.809 ; CC94.2@111.023,153.323 cw(c110.596,152.896) 111.2,152.896 cw(c111.804,152.896) CC94.2@111.377,153.323 ; pad.ICT@111.038,151.962 ccw(c110.646,152.354) 111.2,152.354 ; 111.145,152.305 110.75,152.305 ; CC94.2@111.15,153.523 RC176.1@111.15,155 ; 111.15,154.224 ccw(c111.924,154.224) CC94.2@111.377,153.677 ; pad.ICT@111.2,151.8 CC94.2@111.2,153.5 ; pad.ICT@111.462,151.962 cw(c112.095,152.595) 111.2,152.595 110.91,152.305 110.75,152.305 ; v1(110,152.305) 110.75,152.305
NetCC96_2: CC96.2 pad.ICT@91.75,118.75 RC179.2 RC180.2 UC629.12 | length 11.9
  Top Layer w0.5: UC629.12@89.6,120.27 v1(91.25,120.27)
  Bottom Layer w0.5: CC96.2@89.873,119.073 cw(c89.326,118.526) 90.1,118.526 ; RC179.2@89.959,117.941 ccw(c89.617,118.283) 90.1,118.283 ccw(c90.583,118.283) RC179.2@90.241,117.941 ; CC96.2@90.05,119.25 CC96.2@90.1,119.2 ; RC179.2@90.1,117.75 90.1,119.5 91,119.5 ; CC96.2@90.256,119.108 cw(c91,118.598) 91,119.5 ; v1(91.25,120.27) 91.25,119.75 91,119.5 ; v1@91.27,120.25 RC180.2@92.4,120.25 ; v1@91.356,120.376 ccw(c91.66,120.68) 91.66,120.25 ; pad.ICT@91.45,118.75 ccw(c90.726,118.75) 91.238,119.262 ccw(c91.75,119.774) pad.ICT@91.75,119.05 ; pad.ICT@91.75,118.75 91,119.5 ; RC180.2@92.259,120.109 ccw(c91.917,119.767) 91.917,120.25 ccw(c91.917,120.733) RC180.2@92.259,120.391
NetCC97_1: CC97.1 pad.ICT@96.5,122.5 RC191.2 RC192.2 UC629.13 | length 22.2
  Top Layer w0.5: UC629.13@89.6,121.54 v1(91.25,121.54)
  Bottom Layer w0.5: CC97.1@89.863,122.084 ccw(c91.075,123.163) v1@91.075,121.54 ; CC97.1@89.873,122.073 cw(c89.446,121.646) 90.05,121.646 cw(c90.654,121.646) CC97.1@90.227,122.073 ; 90.05,121.404 ccw(c90.704,121.404) RC192.2@90.241,120.941 ; CC97.1@90.05,122.25 90.05,120.8 RC192.2@90.31,120.54 ; CC97.1@90.237,122.416 ccw(c92.19,124.155) RC191.2@92.19,121.54 ; 90.31,121.54 RC191.2@92.19,121.54 ; v1@91.531,121.54 ccw(c91.531,122.569) RC191.2@92.259,121.841 ; RC191.2@92.102,121.762 cw(c92.718,121.84) 92.279,122.279 ; RC191.2@92.259,121.941 ccw(c91.917,122.283) 92.4,122.283 ccw(c92.883,122.283) RC191.2@92.541,121.941 ; RC191.2@92.598,121.825 cw(c93.997,122.003) 93,123 ; 94.569,123 cw(c94.569,120.569) pad.ICT@96.288,122.288 ; 95.776,123 cw(c95.776,121.776) pad.ICT@96.641,122.641 ; pad.ICT@96.5,122.5 96,123 93,123 ; RC191.2@92.19,121.54 RC191.2@92.4,121.75 92.4,122.4 93,123
NetCC97_2: CC97.2 pad.ICT@87,122.5 RC184.2 RC192.1 UC629.14 | length 17.7
  Top Layer w0.5: UC629.14@89.6,122.81 v1(91.25,122.81) ; RC184.2@92.238,123.317 cw(c91.25,124.026) v1(91.25,122.81) ; RC184.2@92.4,123.25 91.96,122.81 v1(91.25,122.81)
  Bottom Layer w0.25: pad.ICT@87.301,122.199 cw(c88.026,121.474) 88.026,122.5 cw(c88.026,123.526) pad.ICT@87.301,122.801 ; 87.58,122.5 cw(c87.58,121.428) CC97.2@88.359,122.164 ; CC97.2@88.177,121.993 ccw(c87,120.881) pad.ICT@87,122.5 CC97.2@88.2,122.5 ; CC97.2@88.242,122.562 ccw(c87.984,122.95) 88.45,122.95 ; CC97.2@88.45,122.25 88.45,122.95 ; CC97.2@88.658,122.562 cw(c88.916,122.95) 88.45,122.95 ; v1@90.975,122.823 ccw(c90.409,122.849) 90.81,123.25 ; v1@91.237,123.085 cw(c91.211,123.651) 90.81,123.25 ; v1(91.25,122.81) 90.81,123.25 ; 88.45,122.95 88.75,123.25 90.81,123.25
  Bottom Layer w0.5: RC192.1@88.259,120.941 ccw(c87.917,121.283) 88.4,121.283 ccw(c88.883,121.283) RC192.1@88.541,120.941 ; RC192.1@88.4,120.75 CC97.2@88.4,122.25 ; 88.4,121.526 cw(c89.174,121.526) CC97.2@88.627,122.073
NetCC98_2: CC98.2 pad.ICT@15,142.5 RC188.2 RC593.2 UC634.5 | length 23.2
  Top Layer w0.5: RC593.2@10,142.7 10.2,142.5 v1(13.5,142.5) 16.55,139.45 18.25,139.45 ; RC593.2@10.533,142.983 ccw(c11.699,144.149) 11.699,142.5 ; CC98.2@18.373,138.073 cw(c17.946,137.646) 18.55,137.646 cw(c19.154,137.646) CC98.2@18.727,138.073 ; CC98.2@18.373,138.427 ccw(c17.946,138.854) 18.55,138.854 ccw(c19.154,138.854) CC98.2@18.727,138.427 ; RC188.2@18.55,136.8 CC98.2@18.55,138.25 18.55,139 ; 18.55,137.404 ccw(c19.204,137.404) RC188.2@18.741,136.941 ; 18.55,139.15 18.25,139.45 ; 18.55,139.4 18.55,139 ; UC634.5@21.4,140.48 19.98,140.48 18.95,139.45 ; 18.25,139.45 18.95,139.45 ; 18.55,139 18.55,139.05 18.95,139.45
  Bottom Layer w0.5: v1(13.5,142.5) pad.ICT@15,142.5 ; pad.ICT@14.788,142.288 ccw(c14.276,141.776) 14.276,142.5 ccw(c14.276,143.224) pad.ICT@14.788,142.712
NetCC99_2: CC99.2 pad.ICT@114.5,198.75 RC196.1 UC16.10 | length 12.8
  Top Layer w0.5: UC16.10@110.1,198.575 111.325,198.575 v1(111.75,199) CC99.2@112.95,199 ; UC16.10@110.362,198.575 ccw(c110.362,200.388) v1@111.644,199.106 ; UC16.10@110.9,198.625 ccw(c110.9,199.772) v1@111.711,198.961 ; 111.569,198.575 ccw(c111.569,199.181) v1@111.997,198.753 ; CC99.2@112.773,198.823 ccw(c112.346,198.396) 112.346,199 ccw(c112.346,199.604) CC99.2@112.773,199.177
  Bottom Layer w0.5: RC196.1@110.6,199 v1(111.75,199) 114.25,199 pad.ICT@114.5,198.75 ; RC196.1@110.741,198.859 cw(c111.083,198.517) 111.083,199 cw(c111.083,199.483) RC196.1@110.741,199.141 ; 113.172,199 cw(c113.172,197.422) pad.ICT@114.288,198.538
NetCC100_2: CC100.2 pad.ICT@112.25,196.25 RC197.1 UC16.9 | length 10.2
  Top Layer w0.5: UC16.9@110.1,197.305 111.555,197.305 v1(111.75,197.5) CC100.2@112.95,197.5 CC100.2@112.755,197.305 ; UC16.9@110.917,197.305 ccw(c110.917,198.333) v1@111.644,197.606 ; CC100.2@112.773,197.323 ccw(c112.346,196.896) 112.346,197.5 ccw(c112.346,198.104) CC100.2@112.773,197.677
  Bottom Layer w0.5: RC197.1@110.741,197.359 cw(c111.083,197.017) 111.083,197.5 cw(c111.083,197.983) RC197.1@110.741,197.641 ; RC197.1@110.795,197.5 v1(111.75,197.5) 112.25,197 pad.ICT@112.25,196.25 ; pad.ICT@112.038,196.462 ccw(c111.526,196.974) 112.25,196.974 ccw(c112.974,196.974) pad.ICT@112.462,196.462 ; 112.128,197.122 cw(c111.34,196.335) pad.ICT@112.449,196.231
NetCC101_2: CC101.2 pad.ICT@115,121.25 RC198.2 RC199.2 UC630.12 | length 16
  Top Layer w0.5: UC630.12@111.6,120.27 v1(113.48,120.27) ; v1@113.5,120.25 RC199.2@115.15,120.25 ; v1@113.586,120.376 ccw(c113.89,120.68) 113.89,120.25 ; RC199.2@115.009,120.109 ccw(c114.667,119.767) 114.667,120.25 ccw(c114.667,120.733) RC199.2@115.009,120.391
  Bottom Layer w0.25: v1(113.48,120.27) 113.77,120.27 pad.ICT@114.875,121.375 ; v1@113.48,120.295 ccw(c113.48,121.055) 114.018,120.518 ; v1@113.48,120.545 ccw(c113.48,121.909) 114.445,120.945 ; v1@113.848,120.348 cw(c115,119.195) pad.ICT@115,120.825 ; 114.274,120.774 cw(c115,120.049) pad.ICT@115,121.075 ; 114.451,120.951 ccw(c114.153,121.25) pad.ICT@114.575,121.25
  Bottom Layer w0.5: CC101.2@111.873,118.927 ccw(c111.326,119.474) 112.1,119.474 ; RC198.2@111.959,120.059 cw(c111.617,119.717) 112.1,119.717 cw(c112.583,119.717) RC198.2@112.241,120.059 ; CC101.2@112.05,118.75 112.1,118.8 RC198.2@112.1,120.25 ; RC198.2@112.12,120.27 RC198.2@112.1,120.25 ; RC198.2@112.241,120.109 cw(c112.583,119.767) 112.583,120.25 cw(c112.583,120.733) RC198.2@112.241,120.391 ; 113.07,120.25 ccw(c113.07,120.68) v1@113.374,120.376 ; v1@113.48,120.25 RC198.2@112.1,120.25
NetCC102_1: CC102.1 pad.ICT@116.25,123.5 RC202.2 RC203.2 UC630.13 | length 15.7
  Top Layer w0.5: UC630.13@111.6,121.54 v1(113.46,121.54) RC202.2@114.94,121.54 ; 114.281,121.54 ccw(c114.281,122.569) RC202.2@115.009,121.841
  Bottom Layer w0.25: v1(113.46,121.54) 115.42,123.5 ; v1@113.46,121.815 ccw(c113.46,122.479) 113.929,122.009 ccw(c114.399,121.54) v1@113.735,121.54 ; pad.ICT@115.905,123.252 ccw(c115.42,122.902) 115.42,123.5 ; pad.ICT@115.905,123.748 cw(c115.42,124.098) 115.42,123.5 ; pad.ICT@116.25,123.5 115.42,123.5
  Bottom Layer w0.5: CC102.1@111.873,121.927 ccw(c111.446,122.354) 112.05,122.354 ccw(c112.654,122.354) 112.227,121.927 ccw(c113.161,122.861) v1@113.161,121.54 ; CC102.1@112.01,121.54 v1(113.46,121.54) ; 112.05,122.596 cw(c112.704,122.596) RC203.2@112.241,123.059 ; RC203.2@112.101,123.201 112.05,123.2 CC102.1@112.05,121.75 CC102.1@112.26,121.54
NetCC102_2: CC102.2 pad.ICT@109,121.5 RC201.2 RC203.1 UC630.14 | length 19.4
  Top Layer w0.5: UC630.14@111.6,122.81 113.31,122.81 v1(113.75,123.25) RC201.2@115.15,123.25 ; UC630.14@112.326,122.81 ccw(c112.326,124.674) v1@113.644,123.356 ; 113.533,122.81 ccw(c113.533,123.467) v1@113.997,123.003 ; RC201.2@115.009,123.109 ccw(c114.667,122.767) 114.667,123.25 ccw(c114.667,123.733) RC201.2@115.009,123.391
  Bottom Layer w0.25: RC203.1@110.4,123.25 111.4,124.25 112.75,124.25 v1(113.75,123.25) ; RC203.1@110.4,123.625 ccw(c110.4,124.53) 111.04,123.89 ; RC203.1@110.725,123.3 cw(c111.389,123.3) 110.919,123.769 ; v1@113.475,123.25 ccw(c112.811,123.25) 113.281,123.719 ccw(c113.75,124.189) v1@113.75,123.525
  Bottom Layer w0.5: pad.ICT@109,121.75 CC102.2@110.45,121.75 110.4,121.8 RC203.1@110.4,123.25 ; pad.ICT@109.212,121.288 cw(c110.328,120.172) CC102.2@110.328,121.75 ; RC203.1@110.259,123.059 cw(c109.917,122.717) 110.4,122.717 cw(c110.883,122.717) RC203.1@110.541,123.059 ; CC102.2@110.273,121.573 ccw(c109.846,121.146) 109.846,121.75 ccw(c109.846,122.354) CC102.2@110.273,121.927 ; 110.4,122.474 ccw(c111.174,122.474) CC102.2@110.627,121.927
NetCC104_1: CC104.1 pad.ICT@56.25,130.75 RC211.1 | length 7.7
  Bottom Layer w0.5: pad.ICT@56.25,130.75 56.6,131.1 RC211.1@58.25,131.1 CC104.1@58.25,132.7 ; pad.ICT@56.462,130.538 cw(c57.819,129.181) RC211.1@57.819,131.1 ; RC211.1@58.059,130.959 ccw(c57.717,130.617) 57.717,131.1 ccw(c57.717,131.583) RC211.1@58.059,131.241 ; CC104.1@58.073,132.523 cw(c57.646,132.096) 58.25,132.096 cw(c58.854,132.096) CC104.1@58.427,132.523 ; RC211.1@58.109,131.241 ccw(c57.767,131.583) 58.25,131.583 ccw(c58.733,131.583) RC211.1@58.391,131.241
NetCC105_1: CC105.1 pad.ICT@71.405,130.345 UC19.5 | length 7.6
  Top Layer w0.5: UC19.5@68.35,130.345 70.545,130.345 CC105.1@70.95,130.75 ; UC19.5@69.369,130.345 ccw(c69.369,132.331) CC105.1@70.773,130.927 ; CC105.1@70.576,130.345 ccw(c70.576,131.124) CC105.1@71.127,130.573
  Bottom Layer w0.5: v1(69.85,130.345) pad.ICT@71.405,130.345 ; pad.ICT@71.193,130.133 ccw(c70.681,129.621) 70.681,130.345 ccw(c70.681,131.069) pad.ICT@71.193,130.557
NetCC106_1: CC106.1 pad.ICT@70.5,134 RC206.1 RC213.2 UC19.6 UC19.7 | length 14.4
  Top Layer w0.5: UC19.6@68.35,131.615 UC19.7@68.35,132.885 v1(70,132.885) ; v1@70,132.735 cw(c70,131.733) RC206.1@70.708,132.442 ; RC206.1@70.473,132.677 ccw(c70.9,133.104) RC206.1@70.9,132.5 ; RC206.1@70.702,132.273 ccw(c70,132.177) v1(70,132.885) ; RC206.1@70.9,132.25 70.265,132.885 v1(70,132.885)
  Bottom Layer w0.5: CC106.1@68.623,134.073 cw(c68.076,133.526) 68.85,133.526 ; RC213.2@68.709,132.941 ccw(c68.367,133.283) 68.85,133.283 ccw(c69.333,133.283) RC213.2@68.991,132.941 ; RC213.2@68.85,132.75 CC106.1@68.85,134.2 ; CC106.1@68.977,134.427 ccw(c70.007,135.457) pad.ICT@70.007,134 ; RC213.2@68.985,132.885 v1(70,132.885) ; RC213.2@68.991,132.659 cw(c69.538,132.112) 69.538,132.885 ; CC106.1@69.135,134 pad.ICT@70.5,134 ; pad.ICT@70.288,133.788 ccw(c69.776,133.276) 69.776,134 ccw(c69.776,134.724) pad.ICT@70.288,134.212
NetCC146_1: CC146.1 pad.ICT@91.315,205.685 RC233.2 UC601.1 | length 9.5
  Top Layer w0.5: CC146.1@88.623,206.177 ccw(c88.076,206.724) 88.85,206.724 ; RC233.2@88.709,207.309 cw(c88.367,206.967) 88.85,206.967 cw(c89.333,206.967) RC233.2@88.991,207.309 ; RC233.2@88.85,207.5 88.85,206.05 89.215,205.685 UC601.1@91.65,205.685 ; CC146.1@88.977,206.177 ccw(c90.164,207.364) v1@90.164,205.685
  Bottom Layer w0.5: v1(90,205.685) pad.ICT@91.315,205.685 ; pad.ICT@91.103,205.473 ccw(c90.591,204.961) 90.591,205.685 ccw(c90.591,206.409) pad.ICT@91.103,205.897
NetCC150_2: CC150.2 UC20.55 | length 8.6
  Top Layer w0.25: v1(52,177.25) 52.025,177.25 52.75,177.975 52.75,178.775 52.5,179.025 UC20.55@52.5,180.7 ; v1@52,177.525 ccw(c52,178.25) 52.513,177.737 ; v1@52.275,177.25 cw(c52.878,177.25) 52.452,177.676
  Bottom Layer w0.25: CC150.2@51.699,176.301 ccw(c50.974,177.026) v1@52,177.026 ; v1@51.806,177.056 cw(c51.336,176.586) 52,176.586 cw(c52.664,176.586) v1@52.194,177.056 ; CC150.2@52,176.25 v1(52,177.25) ; v1@52,177.026 ccw(c53.026,177.026) CC150.2@52.301,176.301
NetCC151_2: CC151.2 UC20.56 | length 10.7
  Top Layer w0.25: UC20.56@53,180.7 53,179.162 53.2,178.962 v1(53.2,177.3) ; v1@53.006,177.494 ccw(c52.536,177.964) 53.2,177.964 ccw(c53.864,177.964) v1@53.394,177.494
  Bottom Layer w0.25: v1@53.006,177.106 cw(c52.536,176.636) 53.2,176.636 cw(c53.864,176.636) v1@53.394,177.106 ; 53.2,176.666 ccw(c53.96,176.666) CC151.2@53.783,175.927 ; v1@53.2,176.983 ccw(c54.036,176.983) CC151.2@53.841,176.17 ; CC151.2@53.899,176.413 cw(c54.112,177.3) v1(53.2,177.3) 53.2,176.55 53.75,176 CC151.2@54,176
NetCC161_2: CC161.2 pad.ICT@76.25,192.75 RC266.1 UC20.104 XLC1.1 | length 23.1
  Top Layer w0.25: UC20.104@70.8,190 74.5,190 75.25,190.75 75.25,193.75 v1(76,194.5) 76.5,195 ; XLC1.1@76.19,195.566 cw(c75.829,195) 76.5,195 ; XLC1.1@76.5,196.3 76.5,195 ; XLC1.1@76.81,195.566 ccw(c77.171,195) 76.5,195
  Bottom Layer w0.25: v1(76,194.5) RC266.1@77.15,194.5 77.15,193.65 pad.ICT@76.25,192.75 ; v1@76.194,194.306 cw(c76.664,193.836) 76.664,194.5 cw(c76.664,195.164) v1@76.194,194.694 ; RC266.1@76.92,194.22 cw(c76.365,193.665) 77.15,193.665 cw(c77.935,193.665) RC266.1@77.38,194.22 ; RC266.1@76.92,194.27 ccw(c76.365,193.715) 76.365,194.5 ccw(c76.365,195.285) RC266.1@76.92,194.73 ; RC266.1@76.92,194.78 ccw(c76.245,195.455) 77.2,195.455 ; CC161.2@76.935,195.735 cw(c76.295,195.095) 77.2,195.095 cw(c78.105,195.095) CC161.2@77.465,195.735 ; RC266.1@77.2,194.55 CC161.2@77.2,196 ; 77.2,195.214 ccw(c77.814,195.214) RC266.1@77.38,194.78
NetCC162_2: CC162.2 pad.ICT@78.25,190.25 RC266.2 UC20.102 XLC1.3 | length 23.5
  Top Layer w0.25: UC20.102@70.8,189 74,189 75.25,189 75.75,188.5 77.3,188.5 CC162.2@78.3,189.5 79,190.2 XLC1.3@79,191.7 v1(79,193.25) ; XLC1.3@78.613,192.375 ccw(c77.818,193.25) v1(79,193.25) ; XLC1.3@78.781,192.19 ccw(c78.332,192.685) 79,192.685 ccw(c79.668,192.685) XLC1.3@79.219,192.19 ; v1@78.806,193.056 cw(c78.336,192.586) 79,192.586 cw(c79.664,192.586) v1@79.194,193.056 ; XLC1.3@79.387,192.375 cw(c80.182,193.25) v1(79,193.25)
  Bottom Layer w0.25: pad.ICT@78.25,190.25 79,191 v1(79,193.25) 79,194.35 RC266.2@78.85,194.5 ; RC266.2@78.62,194.22 cw(c77.703,193.303) v1@79,193.303 ; RC266.2@78.797,194.397 cw(c78.307,193.907) 79,193.907 ; v1@78.806,193.444 ccw(c78.336,193.914) 79,193.914 ccw(c79.664,193.914) v1@79.194,193.444
NetCC164_1: CC164.1 pad.ICT@48.45,148.2 UC23.6 | length 11.6
  Top Layer w0.4: UC23.6@46.677,143.175 47.875,143.175 CC164.1@48.45,143.75 v1(48.45,146.75) ; CC164.1@48.15,143.75 cw(c47.426,143.75) 47.938,143.238 cw(c48.45,142.726) CC164.1@48.45,143.45 ; CC164.1@48.238,143.962 ccw(c47.726,144.474) 48.45,144.474 ccw(c49.174,144.474) CC164.1@48.662,143.962 ; v1@48.309,146.609 cw(c47.967,146.267) 48.45,146.267 cw(c48.933,146.267) v1@48.591,146.609
  Bottom Layer w0.4: pad.ICT@48.203,147.953 cw(c47.605,147.355) 48.45,147.355 cw(c49.295,147.355) pad.ICT@48.697,147.953 ; v1@48.309,146.891 ccw(c47.967,147.233) 48.45,147.233 ccw(c48.933,147.233) v1@48.591,146.891 ; v1(48.45,146.75) pad.ICT@48.45,148.2
NetCC166_1: CC166.1 pad.ICT@63.75,167.25 RC280.2 UC641.1 | length 11.9
  Top Layer w0.5: v1(65.5,167.5) 66.35,168.35 RC280.2@66.35,169.25 ; CC166.1@66.123,170.573 cw(c65.696,170.146) 66.3,170.146 cw(c66.904,170.146) CC166.1@66.477,170.573 ; RC280.2@66.209,169.059 cw(c65.867,168.717) 66.35,168.717 cw(c66.833,168.717) RC280.2@66.491,169.059 ; RC280.2@66.3,169.3 CC166.1@66.3,170.75 ; 66.3,169.904 ccw(c66.954,169.904) RC280.2@66.491,169.441 ; CC166.1@66.477,170.927 ccw(c67.362,171.812) 67.362,170.56 ; CC166.1@66.49,170.56 UC641.1@68.65,170.56
  Bottom Layer w0.5: pad.ICT@63.75,167.5 v1(65.5,167.5) ; pad.ICT@63.962,167.038 cw(c65.078,165.922) 65.078,167.5
NetCC185_1: CC185.1 pad.ICT@63.5,232 RC314.1 RC316.1 UC3.1 | length 18.5
  Top Layer w0.25: v1@63.335,228.277 cw(c62.865,227.807) 63.529,227.807 cw(c64.193,227.807) v1@63.723,228.277 ; UC3.1@63.529,227.504 v1(63.529,228.471)
  Bottom Layer w0.25: RC314.1@61.62,230.03 ccw(c61.065,230.585) 61.85,230.585 ccw(c62.635,230.585) RC314.1@62.08,230.03 ; RC316.1@61.62,230.97 cw(c61.065,230.415) 61.85,230.415 cw(c62.635,230.415) RC316.1@62.08,230.97 ; RC316.1@61.85,231.25 RC314.1@61.85,229.75 CC185.1@63.45,229.75 63.529,229.671 v1(63.529,228.471) ; RC314.1@62.08,229.52 cw(c62.635,228.965) 62.635,229.75 cw(c62.635,230.535) RC314.1@62.08,229.98 ; CC185.1@63.185,230.015 cw(c62.545,230.655) 62.545,229.75 cw(c62.545,228.845) 63.185,229.485 cw(c62.354,228.654) v1@63.529,228.654 ; v1@63.335,228.665 ccw(c62.865,229.135) 63.529,229.135 ccw(c64.193,229.135) v1@63.723,228.665 ; 63.529,229.035 cw(c64.165,229.035) CC185.1@63.715,229.485
  Bottom Layer w0.254: RC316.1@61.85,231.25 62.6,232 ; RC316.1@61.85,231.623 ccw(c61.85,232.523) 62.487,231.887 ; RC316.1@62.173,231.3 cw(c62.832,231.3) 62.366,231.766 ; pad.ICT@63.174,231.73 ccw(c62.6,231.254) 62.6,232 ; pad.ICT@63.174,232.27 cw(c62.6,232.746) 62.6,232 ; pad.ICT@63.5,232 62.6,232
NetCC198_2: CC198.2 pad.ICT@30.25,223.25 RC339.2 UC614.2 | length 12.8
  Top Layer w0.5: UC614.2@26.15,225.885 v1(27.75,225.885)
  Bottom Layer w0.25: v1@27.75,225.61 cw(c27.75,224.946) 28.219,225.416 cw(c28.689,225.885) v1@28.025,225.885 ; v1(27.75,225.885) pad.ICT@30.25,223.385 ; 29.429,224.206 cw(c28.473,223.25) pad.ICT@29.825,223.25 ; 29.755,223.88 ccw(c30.25,224.375) pad.ICT@30.25,223.675 ; 29.856,223.779 cw(c29.327,223.25) pad.ICT@30.075,223.25
  Bottom Layer w0.5: CC198.2@26.373,224.677 ccw(c25.826,225.224) 26.6,225.224 ; RC339.2@26.459,225.809 cw(c26.117,225.467) 26.6,225.467 cw(c27.083,225.467) RC339.2@26.741,225.809 ; CC198.2@26.6,224.55 RC339.2@26.6,226 ; RC339.2@26.715,225.885 v1(27.75,225.885) ; RC339.2@26.741,226.091 ccw(c27.24,226.59) 27.24,225.885
NetCC200_2: CC200.2 DC34.1 pad.ICT@30.5,218.75 RC344.1 RC345.1 UC614.3 | length 21.1
  Top Layer w0.5: UC614.3@26.15,224.615 v1(27.75,224.615)
  Bottom Layer w0.5: CC200.2@26.373,222.823 cw(c25.946,222.396) 26.55,222.396 cw(c27.154,222.396) 26.727,222.823 cw(c27.154,222.396) 27.154,223 cw(c27.154,223.604) CC200.2@26.727,223.177 ; RC345.1@26.459,221.309 cw(c26.117,220.967) 26.6,220.967 cw(c27.083,220.967) RC345.1@26.741,221.309 ; RC345.1@26.55,221.55 CC200.2@26.55,223 27.75,223 v1(27.75,224.615) ccw(c29.64,224.615) RC344.1@28.338,223.245 ; 26.55,222.154 ccw(c27.204,222.154) RC345.1@26.741,221.691 ; RC345.1@26.6,221.5 26.6,220.65 DC34.1@28,219.25 ; 27.22,220.03 cw(c25.939,218.75) DC34.1@27.75,218.75 ; 27.476,223 ccw(c27.476,223.824) RC344.1@28.059,223.241 ; RC344.1@27.75,223.45 ccw(c28.532,223.45) RC344.1@27.993,222.883 ; DC34.1@28.3,218.75 pad.ICT@30.5,218.75 ; DC34.1@28.718,218.432 cw(c29.486,217.664) 29.486,218.75 cw(c29.486,219.836) DC34.1@28.718,219.068 ; pad.ICT@30.288,218.538 ccw(c29.776,218.026) 29.776,218.75 ccw(c29.776,219.474) pad.ICT@30.288,218.962
NetCC210_2: CC210.2 pad.ICT@102.75,238.5 QC7.1 QC11.1 RC350.1 UC607.13 | length 26.8
  Top Layer w0.5: UC607.13@101.1,241.54 102.46,241.54 v1(102.75,241.25) 103.5,240.5 CC210.2@103.95,240.5 RC350.1@103.95,239.05 ; UC607.13@101.688,241.54 cw(c101.688,240.188) v1@102.644,241.144 ; v1@102.975,241.025 ccw(c103.699,241.749) CC210.2@103.901,240.745 ; RC350.1@103.759,239.191 ccw(c103.296,239.654) 103.95,239.654 ; CC210.2@103.773,240.323 cw(c103.346,239.896) 103.95,239.896 cw(c104.554,239.896) CC210.2@104.127,240.323
  Bottom Layer w0.25: QC7.1@101.5,233.75 101.75,233.75 102.75,234.75 102.75,235.75 QC11.1@101.5,237 102.75,238.25 v1(102.75,241.25) ; QC7.1@101.5,233.832 ccw(c101.5,234.634) 102.067,234.067 ; QC7.1@101.5,234.082 ccw(c101.5,235.488) 102.494,234.494 ; QC11.1@101.5,236.668 cw(c101.5,235.866) 102.067,236.433 cw(c102.634,237) 101.832,237 cw(c102.634,237) 102.067,237.567 cw(c101.5,238.134) QC11.1@101.5,237.332 ; QC11.1@101.848,237.348 ccw(c100.695,238.5) pad.ICT@102.325,238.5 ; 102.274,237.774 ccw(c101.549,238.5) pad.ICT@102.575,238.5 ; pad.ICT@102.449,238.801 ccw(c101.724,239.526) 102.75,239.526 ccw(c103.776,239.526) pad.ICT@103.051,238.801 ; 102.451,237.951 cw(c102.75,237.653) pad.ICT@102.75,238.075 ; v1@102.556,241.056 cw(c102.086,240.586) 102.75,240.586 cw(c103.414,240.586) v1@102.944,241.056
NetCC211_2: CC211.2 pad.ICT@110.75,238.75 QC8.1 QC12.1 RC352.1 UC606.2 | length 27.1
  Top Layer w0.5: CC211.2@109.32,241.099 cw(c109.99,240.81) 109.99,241.54 ; CC211.2@109.373,241.177 ccw(c108.826,241.724) 109.6,241.724 ; RC352.1@109.459,242.309 cw(c109.117,241.967) 109.6,241.967 cw(c110.083,241.967) RC352.1@109.741,242.309 ; CC211.2@109.6,241.05 RC352.1@109.6,242.5 ; 109.6,241.54 v1(110.75,241.54) ; CC211.2@109.78,240.901 cw(c110.75,240.484) v1(110.75,241.54) ; UC606.2@112.4,241.54 v1(110.75,241.54)
  Bottom Layer w0.25: QC12.1@109.5,236.668 cw(c109.5,235.866) 110.067,236.433 cw(c110.634,237) 109.832,237 cw(c111.238,237) 110.244,237.994 ; QC12.1@109.582,237 cw(c110.384,237) 109.817,237.567 ; QC12.1@109.625,236.875 QC12.1@109.5,237 ; QC12.1@109.625,237.125 QC12.1@109.5,237 ; QC8.1@109.75,233.832 ccw(c109.75,234.634) 110.317,234.067 ; QC8.1@109.75,234 110.25,234 110.75,234.5 110.75,235.75 QC12.1@109.5,237 ; QC8.1@109.75,234.082 ccw(c109.75,235.488) 110.744,234.494 ; 109.848,237.598 ccw(c108.695,238.75) pad.ICT@110.325,238.75 ; 110.274,238.024 ccw(c109.549,238.75) pad.ICT@110.575,238.75 ; pad.ICT@110.449,239.051 ccw(c109.724,239.776) 110.75,239.776 ccw(c111.776,239.776) pad.ICT@111.051,239.051 ; 110.451,238.201 cw(c110.75,237.903) pad.ICT@110.75,238.325 ; v1@110.556,241.346 cw(c110.086,240.876) 110.75,240.876 cw(c111.414,240.876) v1@110.944,241.346 ; v1(110.75,241.54) 110.75,238.5 109.5,237.25 QC12.1@109.5,237
NetCC212_2: CC212.2 pad.ICT@85,247.25 QC9.1 QC13.1 RC353.1 UC608.14 | length 22.3
  Top Layer w0.5: UC608.14@84.6,242.81 v1(86.25,242.81) ; 86.888,242.81 ccw(c86.888,243.639) CC212.2@87.693,243.44 ; CC212.2@87.207,243.56 cw(c86.25,243.796) v1(86.25,242.81) ; RC353.1@87.259,242.191 ccw(c86.796,242.654) 87.45,242.654 ; CC212.2@87.273,243.323 cw(c86.846,242.896) 87.45,242.896 cw(c88.054,242.896) CC212.2@87.627,243.323 ; 87.39,242.81 v1(86.25,242.81) ; RC353.1@87.45,242.05 CC212.2@87.45,243.5
  Bottom Layer w0.25: pad.ICT@84.699,246.949 cw(c83.974,246.224) 85,246.224 cw(c86.026,246.224) pad.ICT@85.301,246.949 ; QC9.1@84.765,245.985 ccw(c84.198,246.552) 85,246.552 ccw(c85.802,246.552) QC9.1@85.235,245.985 ; QC9.1@85,245.418 cw(c85,244.616) 85.567,245.183 cw(c86.134,245.75) QC9.1@85.332,245.75 ; pad.ICT@85,247.25 QC9.1@85,245.75 86.25,244.5 v1(86.25,242.81) ; QC13.1@85.067,242.452 cw(c85.763,241.953) 85.763,242.81 ; QC13.1@85.19,242.81 v1(86.25,242.81) ; QC13.1@85.27,242.307 cw(c86.25,241.605) v1@86.25,242.81 ; v1@86.056,242.616 ccw(c85.586,242.146) 85.586,242.81 ccw(c85.586,243.474) 86.056,243.004 ccw(c85.586,243.474) 86.25,243.474 ccw(c86.914,243.474) v1@86.444,243.004